# Altium PCB PAY-IF_R100.PcbDoc (part 2 of 5)
Units mm, origin at the board's own origin, x right, y up, seen from the top; angles counter-clockwise.
Board outline 93 x 90 mm, 6 copper layers (Top Layer, L2_GND, L3_PWR, L4_SIG, L5_GND, Bottom Layer), stack 1.598 mm thick; 271 components, 237 nets, 1362 pads, 661 vias.
Unrouted connection lines stored in the file: 5.
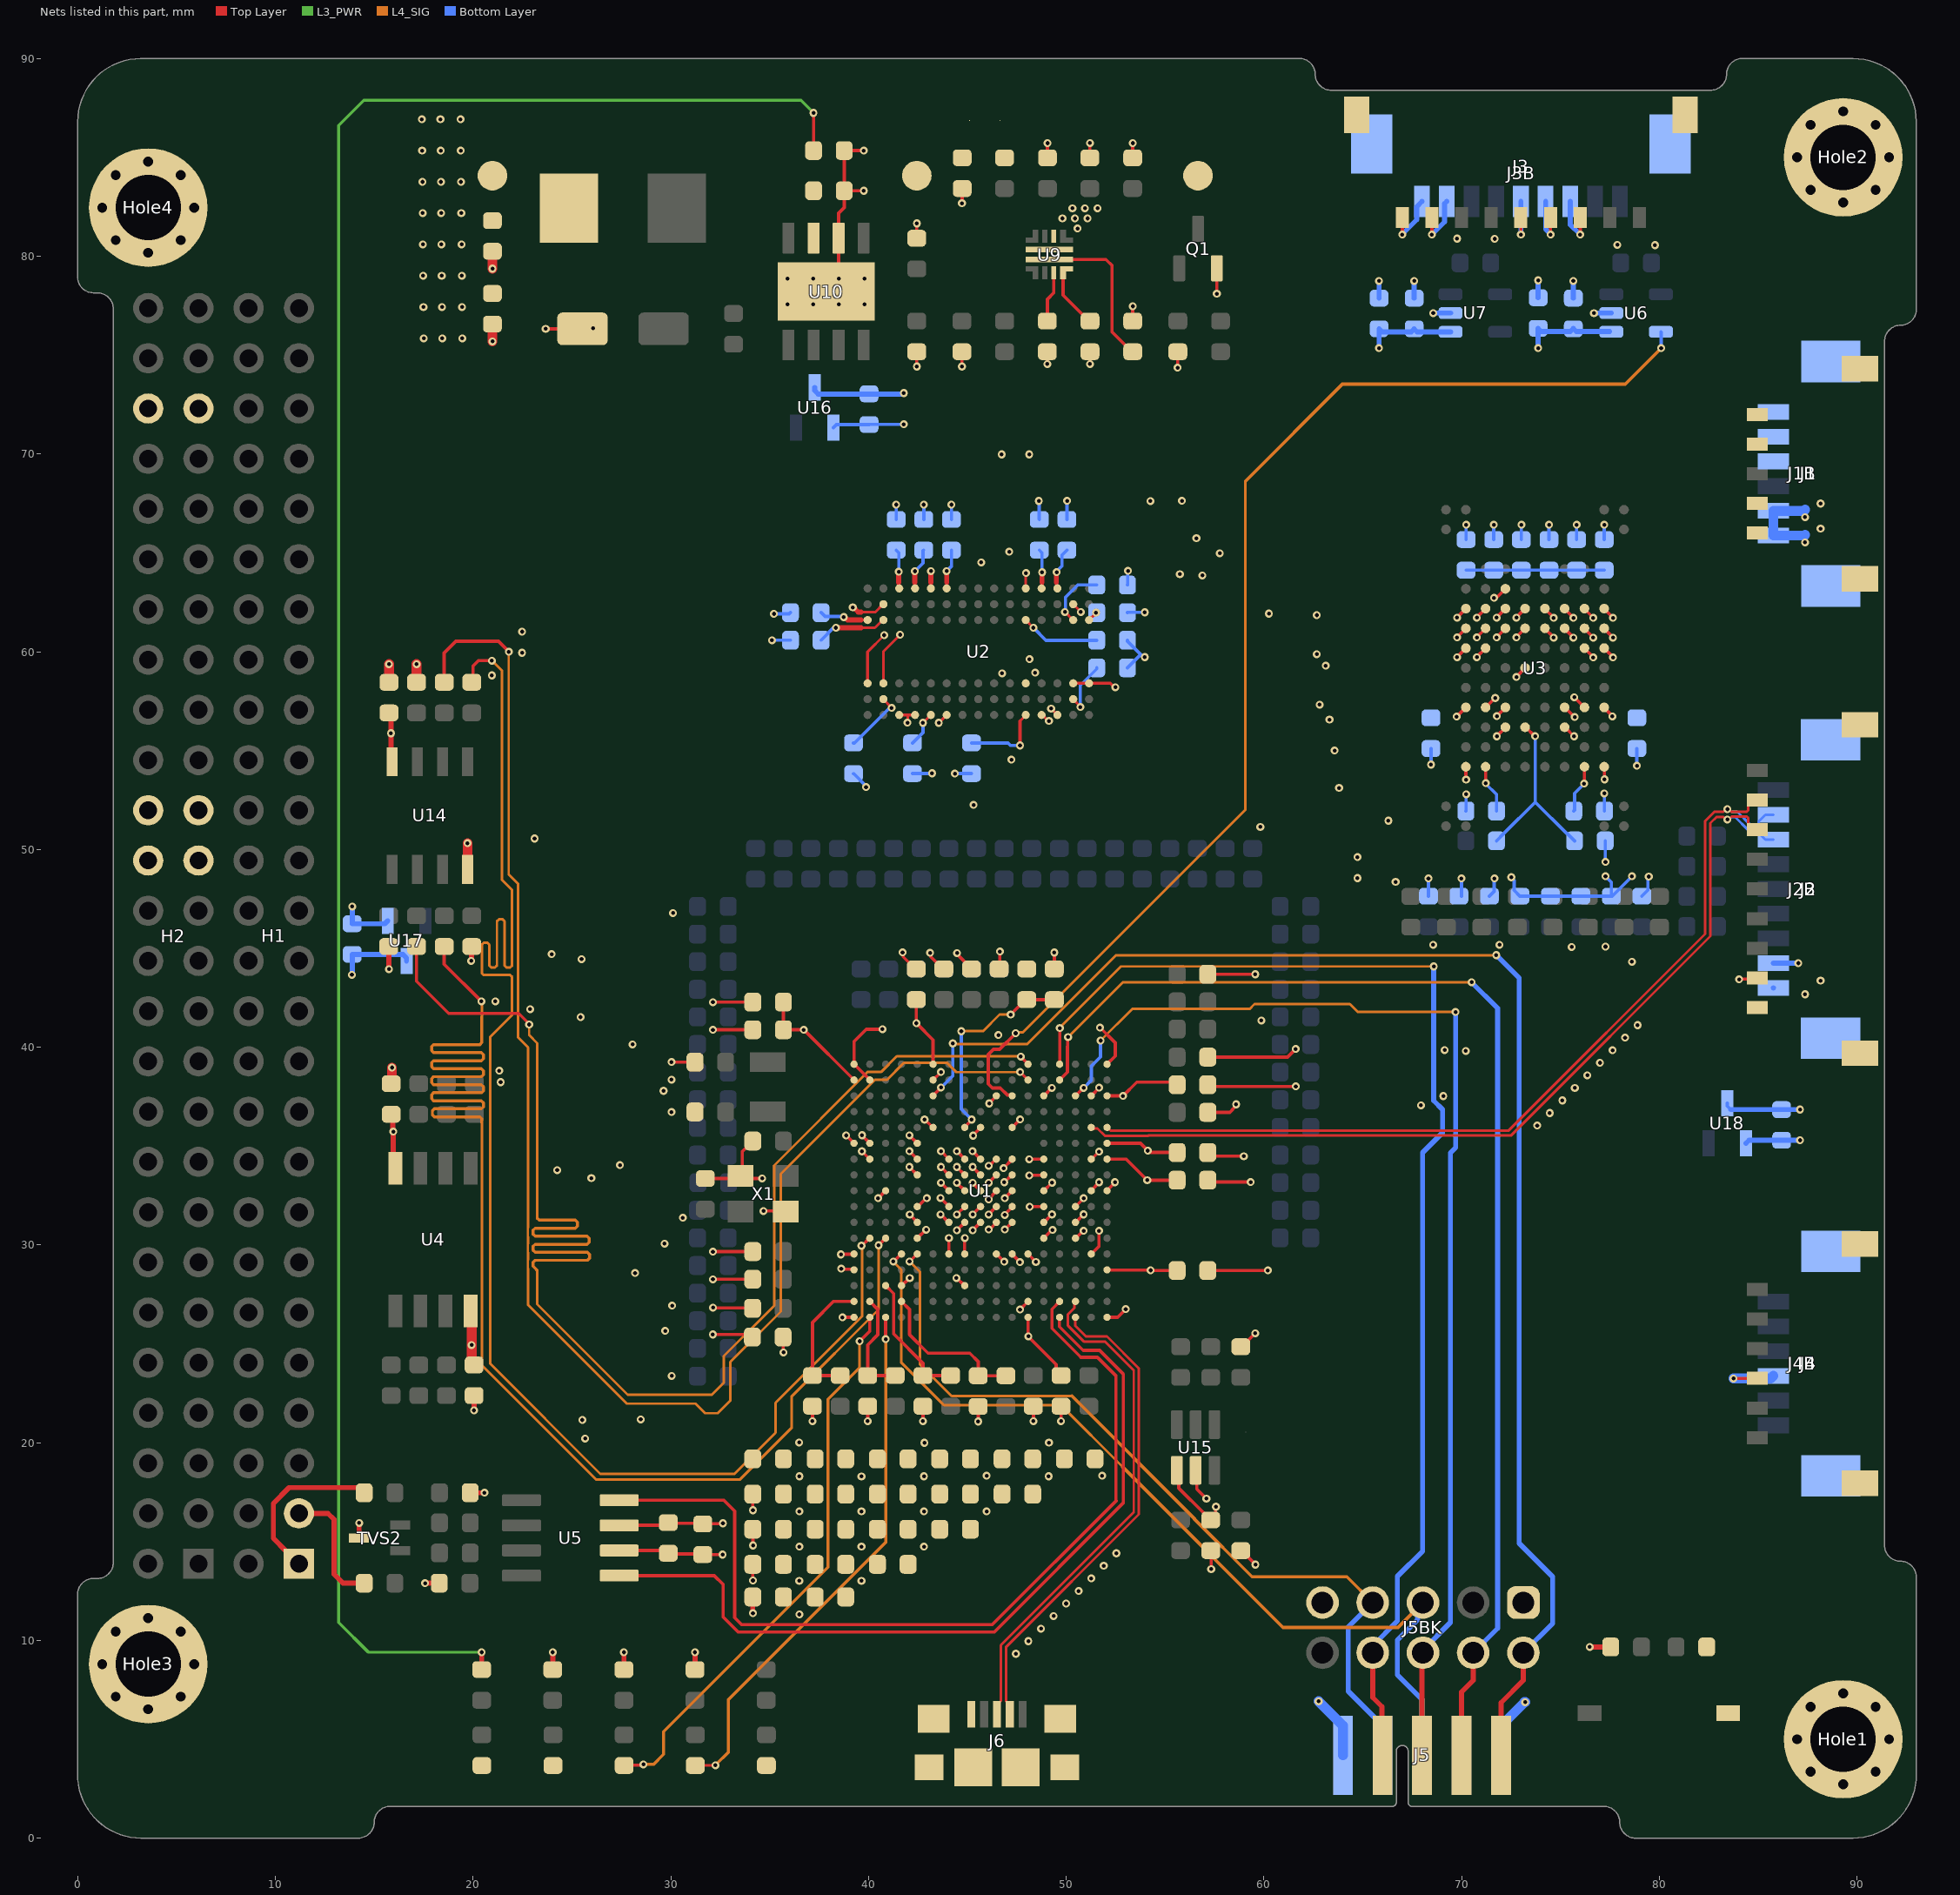
[diagram p6: the nets of this part, all layers, seen from the top]

## Part data
BT1: library part BT2, "Switch button 2 pin"
C1 C2 C3 C4 C5 C6 C7 C8 C9 C10 C11 C12 C13 C14 C15 C16 C17 C18 C19 C20 C21 C22 C23 C24 C25 C26 C27 C28 C29 C30 C31 C32 C33 C34 C35 C36 C37 C38 C39 C40 C41 C44 C45 C46 C47 C48 C49 C50 C58 C59 C60 C61 C62 C63 C64 C65 C66 C67 C68 C69 C70 C71 C72 C73 C74 C75 C76 C77 C78 C79 C80 C86 C87 C88 C89 C90 C91 C92 C93 C94 C95 C96 C97 C98 C99 C100 C101 C103: library part CAP_SMD, "CAP_Chip"
C42 C43: library part _CAP_C_2, "CAP CHIP"
D1: "DIODE SCHOTTKY 40V 5A SMA", MPN=SS34, Solder=SMT
FB2: library part FB, "FERRITE BEAD"
H1 H2: Package=None, Availability=Unavailable, MF=Samtec, MP=ESQ-126-14-G-D, Price=None
J1: "1.50mm Pitch, Pico-Lock PCB Header, Single Row, Right-Angle, Surface Mount, Gold (Au) Plating, Positive Lock, 5 Circuits, Tape and Reel", Manufacturer_Name="Molex Connector Corporation", Copyright="Copyright (C) 2025 Ultra Librarian. All rights reserved.", Manufacturer_Part_Number=5040500591, RefDes=RefDes, Type=Type
J1B J4B: library part CONN_SMD_06, Package=None, Availability=Unavailable, MP=532610671, Price=None
J2 J3: "Connector Header Surface Mount, Right Angle 9 position 0.059\" (1.50mm)"
J2B J3B: library part CONN_SMD_09, "CONN HEADER SMD R/A 9POS 1.25MM"
J4: "1.50mm Pitch, Pico-Lock PCB Header, Single Row, Right-Angle, Surface Mount, Gold (Au) Plating, Positive Lock, 6 Circuits, Tape and Reel", Manufacturer_Name="Molex Connector Corporation", Copyright="Copyright (C) 2025 Ultra Librarian. All rights reserved.", Datasheet=https://www.molex.com/en-us/products/part-detail-pdf/5040500691?display=pdf, Manufacturer_Part_Number=5040500691, RefDes=RefDes, Type=Type
J5: "pads for STLink V3 minie"
J5BK: "WR-PHD Pin Header, THT, Vertical, pitch 2.54mm, 2 Row, 10P", Contact Resistance=20mOhm, Manufacturer="Wurth Elektronik", Operating Temperature Max=105°C, Operating Temperature Min=-40°C, Rated Current=3A, Withstanding Voltage=500V, Working Voltage=250V, Category="Board-to-Board Connectors", ComponentLink1Description="Website Link", ComponentLink1URL=https://www.we-online.com/redexpert/article/61301021121?ad, ComponentLink2Description="Datasheet Link", ComponentLink2URL=https://www.we-online.com/redexpert/spec/61301021121?ad, Gender="Pin Header", Manufacturer Part Number=61301021121, Match Code=WR-PHD, Mount="Through Hole", Number of Pins=10, Number Of Rows=2, Orientation=Vertical, Packaging=Bag, Pitch=2.54mm
J6: "Micro USB 2.0 Type B Receptacle Right Angle SMT, Tape and Reel Packaging", Package=None, Check_prices=https://www.snapeda.com/parts/GMCB05321121BEU/Amphenol/view-part/?ref=eda, MF="Amphenol Commercial Products", MP=GMCB05321121BEU, SnapEDA_Link=https://www.snapeda.com/parts/GMCB05321121BEU/Amphenol/view-part/?ref=snap
L1: library part _IND, "FIXED IND 22UH 2.5A 170 MOHM SMD"
LED1 LED2 LED3 LED4 LED5: library part "LED SMD"
Q1: "BJT, SOT-23, 40V, 600mA, NPN, 0.25W, 150Â°C", Package="SOT-23 Diotec", Check_prices=https://www.snapeda.com/parts/MMBT2222A/Diotec/view-part/?ref=eda, MF="Diotec Semiconductor", MP=MMBT2222A, SnapEDA_Link=https://www.snapeda.com/parts/MMBT2222A/Diotec/view-part/?ref=snap
R1 R2 R3 R4 R5 R6 R7 R8 R9 R10 R11 R12 R13 R14 R15 R16 R17 R18 R19 R20 R21 R22 R23 R24 R25 R26 R27 R28 R29 R30 R31 R32 R33 R34 R35 R36 R37 R38 R39 R40 R41 R42 R43 R44 R45 R46 R47 R48 R49 R50 R51 R52 R53 R54 R55 R56 R57 R58 R59 R60 R61 R62 R63 R64 R65 R66 R67 R68 R69 R70 R71 R72 R73 R74 R75 R76 R77 R78 R79 R80 R81 R82 R83 R84 R85 R86 R87 R88 R89 R90 R91 R92 R93 R94 R95 R96 R97 R98 R99 R100 R114 R115 R116 R117 R118 R119 R121 R123 R124 R125 R126 R127 R128 R142 R143 R148 R150 R151 R152 R153 R154 R155 R156 R157 R158 R159 R160 R161 R162 R163 R164 R165: library part _RES_B_2, "RES"
TP1 TP12 TP13: library part MCD-00630, "Test Point 0.3mm", Manufacturer=N/A, Manufacturer_HQ_COO=Unknown, Component_Country_Of_Origin=Unknown, ComponentLink1URL=http://tunmcdsvn.tun.st.com/Component_Documentation_Library/Trunk, ECCN_EU=n/a, ECCN_US=n/a, ID=3115, Initial_Board_Reference=MB1264, Internal_Part_Number=MCD-00630, Manufacturer_Part_Number=N/A, Order_Code_Digikey=N/A, Order_Code_Farnell=N/A, Order_Code_RS=N/A, Part_Preference=Recommended, Part_Type=Misc, Provided_By=n/a, ShowFields=YES, Status=Released
TVS2: "Automotive dual-line TVS in SOT323-3L for CAN bus (12 V system)", Manufacturer_Name=STMicroelectronics, Copyright="Copyright (C) 2025 Ultra Librarian. All rights reserved.", Manufacturer_Part_Number=ESDCAN02-2BWY, RefDes=RefDes, Type=Type
U1: "High-performance and DSP with DP-FPU, Arm Cortex-M7 + Cortex-M4 MCU with 2MBytes of Flash memory, 1MB RAM, 480 MHz CPU, Art Accelerator, L1 cache, external memory interface, large set of peripherals, SMPS", Manufacturer_Name=STMicroelectronics, Copyright="Copyright (C) 2025 Ultra Librarian. All rights reserved.", Datasheet=https://www.st.com/resource/en/datasheet/stm32h745zg.pdf, Manufacturer_Part_Number=STM32H745XIH6, RefDes=RefDes, Type=Type
U2: "DRAM 128M, 3.3V, SDRAM, 4Mx32, 166Mhz, 90 ball BGA (8mmx13mm) RoHS", Manufacturer_Name="Integrated Silicon Solution Inc.", Arrow Part Number=IS42S32400J-6BL, Arrow Price/Stock=https://www.arrow.com/en/products/is42s32400j-6bl/integrated-silicon-solution-inc?utm_currency=USD&region=nac, Datasheet Link=https://www.issi.com/WW/pdf/42-45S32400J.pdf, Geometry.Height=1.2mm, Manufacturer_Part_Number=IS42S32400J-6BL
U4: "MRAM Avalanche High Performance Serial P-SRAM 4Mb in SOIC8 package with QSPI - 108MHz interface, 3V, -40 C to 105 C", Manufacturer_Name="Avalanche Technology", Mouser Part Number=793-30042040108X0PSY, Datasheet Link=https://www.mouser.ph/ProductDetail/Avalanche-Technology/AS3004204-0108X0PSAY?qs=eP2BKZSCXI7G0ggegRejGg%3D%3D, Geometry.Height=2.16mm, Manufacturer_Part_Number=AS3004204-0108X0PSAY, Mouser Price/Stock=https://www.mouser.co.uk/ProductDetail/Avalanche-Technology/AS3004204-0108X0PSAY/?qs=eP2BKZSCXI7G0ggegRejGg%3D%3D
U5: "3.3 V CAN Transceiver with Standby Mode", Package="SOIC-8 Texas Instruments", Check_prices=https://www.snapeda.com/parts/SN65HVD230DR/Texas+Instruments/view-part/?ref=eda, MF="Texas Instruments", MP=SN65HVD230DR, SnapEDA_Link=https://www.snapeda.com/parts/SN65HVD230DR/Texas+Instruments/view-part/?ref=snap
U6 U7: "Automotive LVDS Differential Driver"
U10: "5.5V to 36V Input, 3A, 500kHz Step-Down Converter", Package="HSOIC-8 Texas Instruments", Availability="In Stock", Check_prices=https://www.snapeda.com/parts/TPS5430DDAR/Texas+Instruments/view-part/?ref=eda, MF="Texas Instruments", MP=TPS5430DDAR, Price=None, Purchase-URL=https://pricing.snapeda.com/search/part/TPS5430DDAR/?ref=eda, SnapEDA_Link=https://www.snapeda.com/parts/TPS5430DDAR/Texas+Instruments/view-part/?ref=snap
U14: "No Description Available", Manufacturer_Name=ISSI, Copyright="Copyright (C) 2025 Ultra Librarian. All rights reserved.", Manufacturer_Part_Number=IS66WVS4M8BLL-104NLI, RefDes=RefDes, Type=Memory
U15: "OSC PROG TIMER TSOT23-6"
U16 U17 U18: "No Description Available", Manufacturer_Name=Microchip, Copyright="Copyright (C) 2025 Ultra Librarian. All rights reserved.", Manufacturer_Part_Number=TC1047AVNBTR, RefDes=RefDes, Type=Type
X1: library part XT4, "Crystal, 25 MHz, -30 to 85 degC, 3.2 x 2.5 x 0.9 mm SMD"
X2: "32.768 kHz +/-20ppm Crystal 12pF 70 kOhms 2-SMD, No Lead , -40C ~ 85C", Manufacturer_Name=Vishay, Mouser Part Number=70-XT1312HHRXX32K76E, Datasheet Link=https://www.vishay.com/docs/35071/xt13.pdf, Geometry.Height=0.8mm, Manufacturer_Part_Number=XT1312HHRXX32K76E, Mouser Price/Stock=https://www.mouser.co.uk/ProductDetail/Vishay-Dale/XT1312HHRXX32K76E?qs=jcD%2FCkGBYeMqyUz9UpSqCw%3D%3D

## Via types
v1: diameter 0.4, hole 0.2, Top Layer to Bottom Layer, tented both sides, 661 vias

## Nets (pads, with @x,y where several pads share a name; then routed paths per layer and width w, separated by ;. In a path a pad name is that pad's centre, name@x,y a point inside that pad or via, vN(x,y) a via of type N, cw(c..) or ccw(c..) an arc to the next point about the centre after c; other vN are vias at no path point)
3V3: C1.2 C2.2 C3.2 C4.2 C5.2 C6.2 C7.2 C8.2 C9.2 C10.2 C11.2 C12.2 C13.2 C14.2 C15.2 C16.2 C17.2 C18.2 C19.2 C20.2 C27.2 C28.2 C29.2 C30.2 C31.2 C32.2 C33.1 C34.1 C36.2 C37.2 C38.2 C39.2 C47.1 C49.2 C50.2 C58.2 C59.2 C60.2 C61.2 C62.2 C63.2 C64.2 C65.2 C66.2 C67.2 C68.2 C69.2 C70.1 C71.2 C72.2 C73.2 C74.2 C75.2 C76.2 C77.2 C78.2 C79.2 C80.2 C88.1 C89.1 C90.2 C91.2 C92.1 C95.2 C96.2 C97.2 C99.2 C101.2 FB2.1 J5.10 J5BK.1 L1.2 R1.2 R2.2 R3.2 R4.2 R5.2 R6.2 R7.2 R8.2 R17.2 R18.2 R22.2 R79.1 R80.1 R82.1 R84.1 R87.1 R117.2 R118.2 R121.2 R127.1 R151.2 R152.2 R153.2 TP13.1 U1.A6 U1.B1 U1.C17 U1.E6 U1.E9 U1.E11 U1.F5 U1.F17 U1.G5 U1.G13 U1.G17 U1.H5 U1.H13 U1.J13 U1.K5 U1.K13 U1.L5 U1.L13 U1.M5 U1.M13 U1.N7 U1.N8 U1.N10 U1.N11 U1.N12 U1.P17 U1.U12 U2.A7 U2.B2 U2.B7 U2.C9 U2.D9 U2.E1 U2.F9 U2.L1 U2.L7 U2.M9 U2.N9 U2.P2 U2.P7 U2.R7 U3.E4@72.215,63.181 U3.F2@70.215,62.181 U3.F3@71.215,62.181 U3.F4@72.215,62.181 U3.F5@73.215,62.181 U3.F6@74.215,62.181 U3.F7@75.215,62.181 U3.F8@76.215,62.181 U3.F9@77.215,62.181 U3.H3@71.215,60.181 U3.H8@76.215,60.181 U3.L2@70.215,57.181 U3.L4@72.215,57.181 U3.L7@75.215,57.181 U3.L9@77.215,57.181 U3.P3@71.215,54.181 U3.P8@76.215,54.181 U4.8 U5.3 U6.1 U7.1 U14.8 U15.1 U16.1 U17.1 U18.1 | length 172
  Top Layer w0.14: 39.624,61.211 40.324,61.211 40.714,61.601 U2.B7@40.757,61.601 ; 39.624,61.601 U2.A7@39.957,61.601 ; U2.B2@40.757,57.601 40.757,57.586 41.167,57.176 v1(41.167,57.161) ; 41.528,63.5 41.528,63.23 U2.C9@41.557,63.201 ; 42.343,63.5 42.343,63.215 U2.D9@42.357,63.201 ; v1@42.855,56.501 U2.E1@43.157,56.801 ; U2.F9@43.957,63.201 43.957,63.5 ; 47.674,56.501 47.957,56.784 U2.L1@47.957,56.801 ; U2.L7@47.957,61.601 47.957,61.599 48.343,61.213 v1(48.343,61.21) ; U2.M9@48.757,63.201 48.778,63.223 48.778,63.5 ; 49.505,63.5 49.505,63.444 49.527,63.422 49.527,63.231 U2.N9@49.557,63.201 ; v1(49.935,62.011) 49.941,62.011 50.351,61.601 U2.P7@50.357,61.601 ; U2.P2@50.357,57.601 50.357,57.583 50.723,57.217 v1(50.723,57.199) ; U2.R7@51.157,61.601 51.157,61.612 v1@51.457,61.912
  Top Layer w0.165: U5.3@27.392,15.814 27.401,15.823 29.875,15.823 29.973,15.921 31.59,15.921 C34.1@31.623,15.888 31.639,15.904 32.623,15.904 v1(32.639,15.921) ; v1(32.126,25.469) 33.999,25.469 C92.1@34.131,25.338 ; v1(32.138,26.831) 32.153,26.816 34.192,26.816 FB2.1@34.207,26.802 ; C95.2@35.7,42.276 C96.2@35.7,40.879 v1(36.729,40.879) U1.B1@39.269,38.339 ; v1(42.069,33.939) U1.H5@42.469,33.539 ; v1(42.069,34.739) U1.G5@42.469,34.339 ; v1(42.069,35.539) U1.F5@42.469,35.139 ; v1(42.089,31.533) 42.089,31.526 42.469,31.146 U1.L5@42.469,31.139 ; C88.1@42.418,42.405 42.419,42.404 42.419,41.213 v1(42.421,41.212) ; v1@42.424,41.215 42.424,41.208 43.269,40.363 U1.A6@43.269,39.139 ; R127.1@42.444,80.912 v1(42.444,81.661) ; U1.M5@42.469,30.339 42.477,30.339 42.907,30.769 v1(42.916,30.769) ; U1.K5@42.469,31.939 42.498,31.939 42.92,32.361 v1(42.95,32.361) ; v1(42.756,56.402) v1@42.855,56.501 ; v1(42.838,36.339) 42.853,36.339 43.253,35.939 U1.E6@43.269,35.939 ; U1.N7@44.069,29.539 v1(44.069,30.345) ; U1.N8@44.869,29.539 44.862,29.546 44.862,30.337 v1@44.869,30.345 ; v1(45.294,35.525) 45.294,35.544 45.669,35.92 U1.E9@45.669,35.939 ; U1.N10@46.469,29.539 46.474,29.539 46.861,29.152 v1(46.865,29.152) ; R84.1@46.609,43.955 46.645,43.991 v1(46.645,44.837) ; U1.N11@47.269,29.539 47.269,29.528 47.663,29.135 v1(47.663,29.124) ; U1.E11@47.269,35.939 v1(47.674,36.343) ; v1(47.665,55.258) 47.665,56.492 47.674,56.501 ; U1.U12@48.069,26.339 48.072,26.336 48.072,25.388 v1(48.086,25.374) ; U1.N12@48.069,29.539 v1(48.469,29.139) ; v1@48.075,25.367 49.491,23.951 49.491,23.643 C89.1@49.74,23.393 ; v1(48.131,33.511) 48.145,33.525 48.855,33.525 U1.H13@48.869,33.539 ; v1(48.131,34.331) 48.135,34.335 48.85,34.335 U1.G13@48.859,34.326 ; v1(48.158,31.928) 48.164,31.933 48.863,31.933 U1.K13@48.869,31.939 ; U1.M13@48.869,30.339 49.286,30.756 v1(49.308,30.756) ; U1.L13@48.869,31.139 48.876,31.139 49.278,31.541 v1(49.285,31.541) ; U1.J13@48.869,32.739 48.873,32.739 49.283,33.149 v1(49.287,33.149) ; v1(49.048,74.549) R117.2@49.048,75.171 ; R82.1@49.403,43.955 v1(49.403,44.788) ; v1(51.207,74.549) R118.2@51.207,75.171 ; U1.P17@52.069,28.739 52.081,28.727 54.263,28.727 v1(54.275,28.715) 54.281,28.709 55.606,28.709 C80.2@55.61,28.705 ; U1.G17@52.069,34.339 53.037,34.339 v1(54.102,33.274) C91.2@55.613,33.274 ; U1.F17@52.069,35.139 53.756,35.139 v1(54.13,34.765) 54.194,34.765 54.284,34.675 55.609,34.675 C90.2@55.613,34.671 ; U1.C17@52.069,37.539 v1@52.871,37.539 ; v1(52.876,37.533) 53.577,38.233 55.48,38.233 C47.1@55.613,38.1 ; U15.1@55.599,18.604 55.701,18.502 55.701,17.699 56.963,16.437 56.963,16.433 57.307,16.089 C59.2@57.311,16.089 57.56,16.338 57.56,16.738 v1(57.578,16.756) ; R18.2@57.163,39.497 61.197,39.497 v1(61.61,39.91) ; R22.2@57.163,43.688 v1(59.563,43.688) ; v1(69.754,56.721) U3.L2@70.215,57.181 ; v1(69.773,61.722) 69.773,61.739 U3.F2@70.215,62.181 U3.F2@70.215,62.198 ; v1(70.773,59.722) 70.773,59.739 U3.H3@71.215,60.181 U3.H3@71.215,60.198 ; v1(70.773,61.722) 70.773,61.739 U3.F3@71.215,62.181 U3.F3@71.215,62.198 ; U3.P3@71.215,54.181 71.218,54.178 71.218,53.356 v1(71.222,53.353) ; v1(71.646,62.722) 71.665,62.741 71.775,62.741 U3.E4@72.215,63.181 ; v1(71.773,61.722) 71.773,61.739 U3.F4@72.215,62.181 U3.F4@72.215,62.198 ; v1(71.786,56.737) 71.786,56.744 72.215,57.173 U3.L4@72.215,57.181 ; v1(72.773,61.722) 72.773,61.739 U3.F5@73.215,62.181 U3.F5@73.215,62.198 ; U3.F6@74.215,62.19 U3.F6@74.215,62.181 74.215,62.172 74.657,61.731 v1(74.657,61.714) ; U3.L7@75.215,57.181 75.223,57.181 75.711,56.692 v1(75.719,56.692) ; U3.F7@75.215,62.19 U3.F7@75.215,62.181 75.215,62.172 75.657,61.731 v1(75.657,61.714) ; v1(76.2,53.327) 76.208,53.335 76.208,54.174 U3.P8@76.215,54.181 ; U3.H8@76.215,60.19 76.215,60.172 76.657,59.731 v1(76.657,59.714) ; U3.F8@76.215,62.19 76.215,62.172 76.657,61.731 v1(76.657,61.714) ; U3.L9@77.215,57.181 77.215,57.16 77.628,56.747 v1(77.628,56.726) ; U3.F9@77.215,62.19 U3.F9@77.215,62.181 77.215,62.172 77.657,61.731 v1(77.657,61.714)
  Top Layer w0.254: R151.2@15.736,45.093 15.742,45.087 15.742,43.948 v1(15.748,43.942) ; C58.2@15.748,56.904 15.847,56.805 v1(15.847,55.876) 15.847,54.5 U14.8@15.913,54.434 ; C32.2@15.86,36.603 15.945,36.518 15.945,35.745 v1(15.963,35.727) 15.963,33.969 U4.8@16.067,33.866 ; R152.2@17.145,58.454 v1@17.145,59.203 ; v1(19.906,44.367) 19.923,44.384 19.923,45.077 R153.2@19.939,45.093 ; v1(20.051,21.63) C31.2@20.051,22.379 ; R121.2@24.032,8.521 v1(24.032,9.398) ; R79.1@27.63,8.521 v1(27.63,9.398) ; R80.1@31.228,8.521 v1(31.228,9.398) ; v1(38.354,61.211) 39.624,61.211 ; v1(38.751,61.75) 38.791,61.75 38.939,61.601 39.624,61.601 ; 41.528,63.5 41.528,64.037 v1(41.534,64.043) ; 42.343,63.5 42.343,64.066 v1(42.349,64.072) ; 43.957,63.5 v1(43.957,64.073) ; 48.778,63.5 48.778,64.015 v1(48.78,64.017) ; 49.505,63.5 49.505,64.008 v1(49.518,64.02) ; v1@51.457,61.912 51.511,61.966 v1(51.511,61.977) ; v1(76.482,9.667) R87.1@77.545,9.667
  Top Layer w0.5: R152.2@17.145,58.454 v1(17.145,59.367)
  Bottom Layer w0.165: C8.2@37.605,60.579 37.605,60.583 38.206,61.183 38.326,61.183 v1(38.354,61.211) ; C12.2@37.605,61.976 37.803,61.778 38.723,61.778 v1(38.751,61.75) ; U16.1@38.232,71.337 38.384,71.488 C99.2@40.031,71.488 40.038,71.495 41.777,71.495 v1(41.783,71.501) ; C19.2@39.243,55.385 39.293,55.385 41.041,57.133 41.139,57.133 v1(41.167,57.161) ; C7.2@41.402,65.138 41.534,65.006 v1(41.534,64.043) ; C16.2@42.227,55.385 42.231,55.385 42.757,55.911 v1@42.757,56.345 ; v1(42.349,64.072) 42.356,64.072 42.764,64.481 42.764,65.107 C14.2@42.795,65.138 ; v1(43.957,64.073) 44.196,64.312 C20.2@44.196,65.138 ; C15.2@45.212,55.385 47.06,55.385 47.187,55.258 v1(47.665,55.258) ; v1(48.343,61.21) 48.979,60.574 C11.2@51.544,60.574 ; C18.2@48.641,65.138 48.78,64.999 v1(48.78,64.017) ; v1(49.518,64.02) 49.518,64.06 49.79,64.332 49.79,64.89 C17.2@50.038,65.138 ; v1(49.935,62.011) 49.968,62.044 49.968,62.756 50.586,63.373 C13.2@51.549,63.373 ; v1(50.723,57.199) 50.723,57.262 50.718,57.267 50.718,57.899 50.709,57.907 50.709,58.292 51.549,59.132 C10.2@51.549,59.182 ; v1(51.511,61.977) C9.2@51.518,61.977 ; C9.2@51.519,61.976 C9.2@51.549,61.976 ; R1.2@68.326,47.638 v1(68.326,48.53) ; R2.2@69.995,47.638 v1(69.995,48.53) ; C6.2@70.231,64.122 C5.2@71.628,64.122 C29.2@73.025,64.122 C30.2@74.422,64.122 C28.2@75.819,64.122 C1.2@77.216,64.122 ; v1(71.222,53.353) 71.222,53.327 71.768,52.781 C3.2@71.768,51.943 ; R3.2@71.41,47.638 71.645,47.873 71.645,48.511 v1(71.664,48.53) ; v1(72.518,48.593) 72.518,48.567 72.657,48.427 72.657,47.929 72.949,47.638 R4.2@72.952,47.638 R5.2@74.495,47.638 R6.2@76.037,47.638 R7.2@77.579,47.638 ; C27.2@75.679,51.943 75.715,51.979 75.715,52.842 v1(76.2,53.327) ; R17.2@77.265,50.433 77.272,50.426 77.272,49.374 v1(77.279,49.367) ; v1(77.279,48.641) 77.579,48.342 R7.2@77.579,47.638 ; v1(78.613,48.641) 78.613,48.632 77.619,47.638 R7.2@77.579,47.638 ; R8.2@79.121,47.638 79.425,47.942 79.425,48.582 v1(79.47,48.627)
  Bottom Layer w0.254: v1(13.888,47.117) C101.2@13.888,46.241 15.536,46.241 U17.1@15.687,46.392 ; v1(65.826,75.349) C36.2@65.826,76.329 65.978,76.177 67.452,76.177 C37.2@67.604,76.329 67.756,76.177 U7.1@69.444,76.177 ; v1(73.874,75.349) C38.2@73.874,76.352 74.026,76.2 75.5,76.2 75.652,76.352 75.804,76.2 U6.1@77.492,76.2 ; U18.1@84.389,35.142 84.54,35.293 C97.2@86.188,35.293 v1(87.122,35.293)
  Bottom Layer w0.5: J5.10@72,4.186 72,5.686 73.184,6.871 v1(73.214,6.871)
  other v1: 36.506,11.311 36.501,13.008 36.506,14.74 42.81,14.74 36.506,16.518 42.81,16.518 36.506,18.296 42.81,18.296 49.115,18.296 42.828,19.992 49.131,20.001 36.497,20.011 44.874,30.345 17.505,75.851 18.441,75.851 19.457,75.851 17.492,77.433 18.428,77.433 19.444,77.433 17.478,79.015 18.415,79.015 19.431,79.015 17.465,80.597 18.401,80.597 19.417,80.597 17.452,82.18 18.388,82.18 19.404,82.18 17.438,83.762 18.375,83.762 19.391,83.762 17.425,85.344 18.361,85.344 19.377,85.344 17.412,86.926 18.348,86.926 19.364,86.926
12V: C40.2 C45.2 C48.2 R119.2 SB1.2 TP1.1 U9.6 U10.7 | length 111.2
  Top Layer w0.165: C45.2@37.224,85.344 v1(37.224,87.249)
  Top Layer w0.254: R119.2@20.435,8.521 v1(20.435,9.398)
  L3_PWR w0.152: v1(20.435,9.398) 14.708,9.398 13.208,10.898 13.208,86.614 14.478,87.884 36.589,87.884 v1(37.224,87.249)
12V_CONN: C41.2 J1.1 J1.2 J1B.5 J1B.6 J2.1 J2B.9 R123.1 SB1.1 TP12.1 U9.5 | length 12.6
  Top Layer w0.165: U9.5@49.147,79.839 52.015,79.839 52.324,79.529 52.324,76.163 53.316,75.171 C41.2@53.366,75.171
  Bottom Layer w0.254: J2B.9@85.77,43 J2B.9@85.773,42.997
  Bottom Layer w0.5: 87.376,65.913 87.338,65.875 J1B.6@85.773,65.875 J1B.5@85.773,67.125 87.318,67.125 87.376,67.183
  other v1: 87.376,42.674 88.158,43.364 87.376,65.532 88.158,66.222 87.376,66.802 88.158,67.492
ADC_ILM: C21.2 R85.2 U1.T4 | length 8
  Top Layer w0.165: U1.T4@41.669,27.139 42.073,26.735 42.073,25.465 43.012,24.526 45.121,24.526 45.551,24.096 45.551,23.393 45.564,23.381 R85.2@46.948,23.381
ADC_TEMP_1: C98.2 R163.2 U1.T1 | length 6.6
  Top Layer w0.165: R163.2@38.566,23.393 C98.2@37.169,23.393 37.169,26.081 38.227,27.139 U1.T1@39.269,27.139
ADC_TEMP_2: C100.2 R164.2 U1.T2 | length 5.5
  Top Layer w0.165: U1.T2@40.069,27.139 40.473,26.735 40.473,25.453 39.963,24.944 C100.2@39.963,23.393 R164.2@41.354,23.393
ADC_TEMP_3: C103.2 R165.2 U1.R3 | length 6.7
  Top Layer w0.165: U1.R3@40.869,27.939 41.271,27.537 41.271,25.497 42.757,24.01 C103.2@42.757,23.393 R165.2@44.154,23.393
AUXOFF: R117.1 U9.3 | length 2.6
  Top Layer w0.165: R117.1@49.048,76.721 49.048,77.828 49.372,78.152 U9.3@49.372,79.163
BOOT0: R82.2 R83.1 U1.E8 | length 10.7
  Top Layer w0.165: U1.E8@44.869,35.939 44.869,35.962 45.222,36.316 v1(45.222,36.339) ; v1(47.192,41.65) 47.196,41.65 47.951,42.405 R83.1@48.006,42.405 ; R83.1@47.956,42.405 R82.2@49.403,42.405
  L4_SIG w0.13: v1(44.695,40.805) 44.711,40.821 45.807,40.821 46.635,41.65 v1(47.192,41.65)
  Bottom Layer w0.165: v1(44.695,40.805) 44.695,36.866 v1(45.222,36.339)
CAN0_H: H1.03 R143.2 | length 6.4
  Top Layer w0.254: H1.03@11.19,16.42 12.663,16.42 12.968,16.115 12.968,13.349 13.424,12.893 R143.2@14.497,12.893
CAN0_L: H1.01 R142.2 | length 8.6
  Top Layer w0.254: H1.01@11.18,13.88 11.18,13.89 10.552,14.518 10.542,14.518 9.896,15.164 9.896,16.925 10.693,17.722 14.24,17.722 R142.2@14.497,17.465
CAN_RX: U1.T14 U5.4 | length 45.6
  Top Layer w0.15: U1.T14@49.669,27.139 49.277,26.747 49.277,25.779 50.739,24.318
  Top Layer w0.165: U5.4@27.392,17.084 32.683,17.084 33.23,16.536 ; 50.739,24.318 51.577,24.318 52.523,23.372 52.523,17.055
  Top Layer w0.169: 33.23,16.536 33.23,11.148 33.582,10.796 46.264,10.796 52.523,17.055
CAN_TX: U1.U14 U5.1 | length 41.6
  Top Layer w0.15: U1.U14@49.656,26.326 49.656,25.873 50.867,24.662
  Top Layer w0.165: U5.1@27.392,13.274 32.202,13.274 32.649,12.826 ; U1.U14@49.656,26.326 U1.U14@49.669,26.339 ; 50.867,24.662 51.697,24.662 52.886,23.473 52.886,16.946
  Top Layer w0.169: 32.649,12.826 32.649,11.177 33.403,10.423 46.363,10.423 52.886,16.946
COMM_USB_FS_N: J6.2 U1.U15 | length 24.9
  Top Layer w0.13: J6.2@47.15,6.257 47.15,6.732 46.954,6.928 46.954,9.651 53.677,16.375 53.677,23.758 52.061,25.374 50.998,25.374 50.469,25.903 U1.U15@50.469,26.339
COMM_USB_FS_P: J6.3 U1.T15 | length 25.9
  Top Layer w0.13: J6.3@46.5,6.257 46.5,6.732 46.696,6.928 46.696,9.758 53.42,16.481 53.42,23.652 51.955,25.117 50.891,25.117 50.094,25.914 50.094,26.494 50.423,26.824 50.423,27.093 U1.T15@50.469,27.139
DEBUG_UART_RX: J5.8 J5BK.5 U1.N4 | length 47.1
  Top Layer w0.165: v1(41.257,29.157) 41.272,29.157 41.654,29.539 U1.N4@41.669,29.539
  L4_SIG w0.13: v1(41.257,29.157) 41.651,28.764 41.651,24.059 43.807,21.903 49.726,21.903 52.855,18.773 52.855,18.77
  L4_SIG w0.169: 52.855,18.77 60.968,10.657 66.791,10.657 J5BK.5@68.047,11.913
  Bottom Layer w0.254: J5.8@68,4.186 68,7.012 66.757,8.255 66.757,10.018 67.779,11.041 67.779,11.645 J5BK.5@68.047,11.913
DEBUG_UART_TX: J5.7 J5BK.7 U1.N5 | length 42.8
  Top Layer w0.165: v1(42.077,29.162) 42.085,29.162 42.462,29.539 U1.N5@42.469,29.539
  L4_SIG w0.13: v1(42.077,29.162) 42.614,28.625 42.614,23.94 44.202,22.352 50.295,22.352
  L4_SIG w0.169: 50.295,22.352 56.495,16.152 56.495,16.124 59.402,13.218 64.201,13.218 J5BK.7@65.507,11.913
  Bottom Layer w0.254: J5BK.7@65.507,11.913 64.262,10.668 64.262,7.424 66,5.686 J5.7@66,4.186
eMMC_RSTn: R17.1 R19.1 U3.M5@73.215,56.181 | length 9.6
  Top Layer w0.165: U3.M5@73.215,56.181 73.241,56.181 73.693,55.729 v1(73.719,55.729)
  Bottom Layer w0.165: R19.1@71.768,50.433 71.768,50.437 72.112,50.781 72.116,50.781 73.729,52.394 ; v1(73.719,55.729) 73.729,55.72 73.729,52.394 ; R17.1@75.715,50.433 75.715,50.437 75.371,50.781 75.342,50.781 73.729,52.394
EXP_USB_FS_N: J2.8 J2B.2 U1.E17 | length 46.4
  Top Layer w0.13: U1.E17@52.069,35.939 52.098,35.939 52.265,35.772 54.044,35.772 54.059,35.786 72.388,35.786 82.321,45.72 82.321,51.433 82.791,51.903 83.241,51.903 83.374,52.037 83.52,52.037 83.643,51.914 84.426,51.914 84.502,51.991 84.502,52.235 84.767,52.5 J2.8@84.958,52.5
  Bottom Layer w0.13: v1(83.447,52.037) 83.52,52.037 83.654,51.903 83.944,51.903 84.594,51.254 84.958,51.254 85.035,51.33 85.035,51.415 85.37,51.75 J2B.2@85.77,51.75
EXP_USB_FS_P: J2.7 J2B.3 U1.E16 | length 47.4
  Top Layer w0.13: U1.E16@51.269,35.939 51.315,35.893 51.584,35.893 51.963,35.514 54.151,35.514 54.166,35.529 72.494,35.529 82.579,45.613 82.579,51.327 82.898,51.646 83.241,51.646 83.374,51.512 83.52,51.512 83.665,51.657 84.426,51.657 84.502,51.581 84.502,51.265 84.767,51 J2.7@84.958,51
  Bottom Layer w0.13: v1(83.447,51.512) 83.52,51.512 83.654,51.646 83.838,51.646 84.487,50.996 84.958,50.996 85.035,50.92 85.035,50.835 85.37,50.5 J2B.3@85.77,50.5
FLT#: R118.1 U9.4 | length 3
  Top Layer w0.165: U9.4@49.847,79.163 49.847,78.031 51.157,76.721 R118.1@51.207,76.721
FRAM_CS: R154.1 U1.A12 | length 76.6
  Top Layer w0.152: R154.1@17.145,45.093 17.145,43.332 18.771,41.707 22.301,41.707 22.837,41.171 v1(22.837,41.147)
  Top Layer w0.165: v1(47.708,39.519) 47.708,39.51 48.069,39.149 U1.A12@48.069,39.139
  L4_SIG w0.13: v1(22.837,41.147) 22.837,40.613 23.244,40.206 23.244,32.427 ; 23.244,28.637 23.244,27.004 27.823,22.425 32.081,22.425 32.685,23.03 32.685,24.381 35.231,26.926 35.231,34.022 39.948,38.739 40.633,38.739 41.433,39.539 47.689,39.539 v1(47.708,39.519)
  L4_SIG w0.152: 23.244,28.637 23.244,28.713 23.143,28.814 23.139,28.814 23.037,28.916 23.037,29.119 23.139,29.22 25.785,29.22 25.886,29.322 25.886,29.525 25.785,29.626 23.139,29.626 23.037,29.728 23.037,29.931 23.139,30.032 25.771,30.032 25.872,30.134 25.872,30.337 25.771,30.438 23.139,30.438 23.037,30.54 23.037,30.743 23.139,30.844 25.17,30.844 25.271,30.946 25.271,31.149 25.17,31.25 23.346,31.25 23.244,31.352 23.244,32.427
FRAM_SPI2_MISO: R157.1 U1.M3 | length 77.5
  Top Layer w0.165: v1(40.514,29.979) 40.514,29.982 U1.M3@40.869,30.339 U1.M3@40.869,30.339
  Top Layer w0.169: R157.1@18.577,45.058 R157.1@18.542,45.093 18.542,44.196 v1(20.422,42.316)
  L4_SIG w0.13: v1(20.422,42.316) 20.444,42.294 20.444,41.525 ; 20.444,36.173 20.444,23.918 26.237,18.125 33.487,18.125 36.124,20.762 36.124,22.347 40.514,26.737 v1(40.514,29.979)
  L4_SIG w0.152: 20.444,36.173 20.444,36.374 20.342,36.475 18.043,36.475 17.942,36.577 17.942,36.78 18.043,36.881 20.425,36.881 20.526,36.983 20.526,37.186 20.425,37.287 18.005,37.287 17.904,37.389 17.904,37.592 18.005,37.693 20.425,37.693 20.526,37.795 20.526,37.998 20.425,38.099 18.005,38.099 17.904,38.201 17.904,38.404 18.005,38.505 20.425,38.505 20.526,38.607 20.526,38.81 20.425,38.911 18.005,38.911 17.904,39.013 17.904,39.216 18.005,39.317 20.425,39.317 20.526,39.419 20.526,39.622 20.425,39.723 18.005,39.723 17.904,39.825 17.904,40.028 18.005,40.129 20.342,40.129 20.444,40.231 20.444,41.525
FRAM_SPI2_MOSI: R156.1 U1.M2 | length 77.7
  Top Layer w0.165: v1(39.646,29.959) 39.667,29.959 40.047,30.339 U1.M2@40.069,30.339
  Top Layer w0.169: R156.1@19.939,58.454 20,58.454 20,59.268 20.279,59.547 v1(20.955,59.547)
  L4_SIG w0.13: v1(20.955,59.547) 21.459,59.043 21.459,48.458 21.978,47.939 21.978,47.371 21.978,44.126 21.882,44.03 21.69,44.03 21.594,44.126 21.594,46.367 21.498,46.463 21.306,46.463 21.21,46.367 21.21,44.126 21.114,44.03 20.922,44.03 20.826,44.126 20.826,45.182 20.73,45.278 20.538,45.278 20.442,45.182 20.442,43.742 20.538,43.646 21.882,43.646 21.978,43.55 21.978,43.485 21.978,41.632 20.875,40.529 20.875,23.984 26.438,18.421 33.226,18.421 35.306,20.502 35.306,22.014 39.673,26.38 39.673,29.932 v1(39.646,29.959)
FRAM_SPI2_SCK: R155.1 U1.B12 | length 79.2
  Top Layer w0.165: v1(47.674,38.741) 47.674,38.737 48.069,38.343 U1.B12@48.069,38.339
  Top Layer w0.169: R155.1@18.542,58.454 18.542,59.933 19.137,60.528 21.28,60.528 v1(21.808,60)
  L4_SIG w0.13: v1(21.808,60) 21.803,59.995 21.803,48.742 22.267,48.278 22.267,40.506 22.784,39.989 22.784,30.866 22.771,30.853 22.771,30.43 22.784,30.417 22.784,30.054 22.771,30.041 22.771,29.618 22.784,29.605 22.784,29.242 22.771,29.229 22.771,28.806 22.784,28.793 22.784,26.963 27.776,21.971 31.258,21.971 31.741,21.488 32.372,21.488 33.01,22.126 33.01,24.081 35.56,26.631 35.56,33.588 40.326,38.354 40.94,38.354 41.786,39.2 43.985,39.2 44.448,38.738 47.671,38.738 v1(47.674,38.741)
GND: BT1.1 C1.1 C2.1 C3.1 C4.1 C5.1 C6.1 C7.1 C8.1 C9.1 C10.1 C11.1 C12.1 C13.1 C14.1 C15.1 C16.1 C17.1 C18.1 C19.1 C20.1 C21.1 C22.1 C23.1 C24.1 C25.1 C26.1 C27.1 C28.1 C29.1 C30.1 C31.1 C32.1 C33.2 C34.2 C35.2 C36.1 C37.1 C38.1 C39.1 C40.1 C41.1 C42.1 C43.1 C45.1 C46.1 C47.2 C48.1 C49.1 C50.1 C58.1 C59.1 C60.1 C61.1 C62.1 C63.1 C64.1 C65.1 C66.1 C67.1 C68.1 C69.1 C70.2 C71.1 C72.1 C73.1 C74.1 C75.1 C76.1 C77.1 C78.1 C79.1 C80.1 C86.1 C87.1 C88.2 C89.2 C90.1 C91.1 C92.2 C93.1 C94.1 C95.1 C96.1 C97.1 C98.1 C99.1 C100.1 C101.1 C103.1 D1.1 H2.29 H2.30 H2.31 H2.32 H2.47 H2.48 Hole1.1 Hole2.1 Hole3.1 Hole4.1 J1.4 J1.5 J1.6 J1B.1 J1B.2 J1B.3 J1B.S1 J1B.S2 J2.2 J2.10 J2B.8 J2B.S1 J2B.S2 J3.5 J3.10 J3B.5 J3B.S1 J3B.S2 J4.3 J4.7 J4B.4 J4B.S1 J4B.S2 J5.6 J5BK.9 J6.5 J6.SH1 J6.SH2 J6.SH3 J6.SH4 J6.SH5 J6.SH6 LED3.2 LED4.2 LED5.2 Q1.2 R83.2 R86.2 R91.1 R116.1 R125.2 R126.2 R128.2 R161.1 R162.1 TVS2.3 U1.A1 U1.A17 U1.B2 U1.B6 U1.C10 U1.C13 U1.C16 U1.F1 U1.F2 U1.G2 U1.G7 U1.G8 U1.G9 U1.G10 U1.G11 U1.G16 U1.H7 U1.H8 U1.H9 U1.H10 U1.H11 U1.J3 U1.J7 U1.J8 U1.J9 U1.J10 U1.J11 U1.J16 U1.J17 U1.K7 U1.K8 U1.K9 U1.K10 U1.K11 U1.K15 U1.L7 U1.L8 U1.L9 U1.L10 U1.L11 U1.L15 U1.M15 U1.N1 U1.N16 U1.P1 U1.R4 U1.R8 U1.T12 U1.U1 U1.U17 U2.A3 U2.B3 U2.B8 U2.C1 U2.D1 U2.E9 U2.F1 U2.L3 U2.L9 U2.M1 U2.N1 U2.P3 U2.P8 U2.R3 U3.G2@70.215,61.181 U3.G3@71.215,61.181 U3.G4@72.215,61.181 U3.G5@73.215,61.181 U3.G6@74.215,61.181 U3.G7@75.215,61.181 U3.G8@76.215,61.181 U3.G9@77.215,61.181 U3.H2@70.215,60.181 U3.H9@77.215,60.181 U3.J5@73.215,59.181 U3.L3@71.215,57.181 U3.L8@76.215,57.181 U3.M4@72.215,56.181 U3.M7@75.215,56.181 U3.P2@70.215,54.181 U3.P9@77.215,54.181 U4.4 U5.2 U6.2 U7.2 U9.8 U10.6 U10.9 U14.4 U15.2 U16.3 U17.3 U18.3 X1.2 X1.4 | length 188.3
  Top Layer w0.12: 47.957,63.5 47.957,63.966 v1(47.965,63.975)
  Top Layer w0.125: U2.L9@47.957,63.201 47.957,63.5
  Top Layer w0.14: 39.624,62.001 39.791,62.001 40.122,62.001 ; U2.A3@39.957,58.401 39.957,59.993 v1(40.801,60.837) ; 40.123,62.002 40.347,62.002 40.746,62.401 U2.B8@40.757,62.401 ; U2.B3@40.757,58.401 40.757,60.019 v1(41.597,60.86) ; U2.C1@41.557,56.801 41.991,56.801 ; v1(41.976,56.408) 41.991,56.423 41.991,56.801 ; U2.D1@42.357,56.801 41.991,56.801 ; U2.E9@43.157,63.201 43.157,63.5 ; v1(43.556,56.402) U2.F1@43.956,56.801 ; U2.M1@48.757,56.801 48.792,56.801 v1@49.092,56.501 ; v1(49.24,57.123) 49.24,57.121 49.557,56.804 U2.N1@49.557,56.801 ; U2.P8@50.357,62.401 50.357,62.398 50.745,62.01 v1(50.745,62.006)
  Top Layer w0.165: v1(23.672,76.332) 23.677,76.327 D1.1@25.535,76.327 ; U5.2@27.392,14.544 29.875,14.544 30.048,14.371 31.59,14.371 C34.2@31.623,14.338 v1(32.623,14.338) ; v1(30.035,39.245) C25.1@31.225,39.245 ; C23.1@31.75,33.358 33.396,33.358 X1.4@33.521,33.483 ; v1(32.133,28.261) v1(32.133,28.261) 34.151,28.263 C94.1@34.153,28.261 ; v1(32.133,29.658) v1(32.133,29.658) 34.151,29.66 C93.1@34.153,29.658 ; v1(32.133,40.876) C96.1@34.151,40.877 ; v1(32.133,42.273) C95.1@34.151,42.274 ; C69.1@34.144,13.849 C69.1@34.15,13.843 34.15,13.034 v1(34.156,13.027) ; C66.1@34.144,17.405 C66.1@34.15,17.399 34.15,16.59 v1(34.156,16.583) ; C67.1@34.15,15.621 34.156,15.615 34.156,14.805 v1(34.163,14.799) ; C22.1@34.15,35.25 34.15,35.246 33.859,34.955 33.855,34.955 33.621,34.721 33.621,33.583 X1.4@33.521,33.483 ; v1(34.628,33.362) 33.642,33.362 X1.4@33.521,33.483 ; v1(34.689,31.715) 35.789,31.715 X1.2@35.821,31.683 ; C92.2@35.681,25.338 35.69,25.329 35.69,24.574 v1(35.699,24.565) ; v1(37.169,21.082) C98.1@37.169,21.843 ; U10.6@38.507,78.867 38.492,78.882 U10.6@38.492,80.917 38.492,82.177 38.774,82.459 C48.1@38.774,83.312 ; v1(38.603,29.519) 38.613,29.529 39.259,29.529 U1.N1@39.269,29.539 ; v1(38.623,28.801) 38.654,28.77 39.238,28.77 U1.P1@39.269,28.739 ; v1(38.684,26.331) 38.688,26.335 39.265,26.335 U1.U1@39.269,26.339 ; C45.1@38.774,85.294 C48.1@38.774,83.312 ; C45.1@38.774,85.344 v1(39.762,85.344) ; v1(38.87,35.535) 38.873,35.535 U1.F1@39.269,35.139 U1.F1@39.271,35.139 ; U1.A1@39.269,39.139 U1.B2@40.069,38.339 ; U1.A1@39.269,39.143 39.269,40.289 39.886,40.905 v1(40.709,40.905) ; v1(39.669,34.732) 39.673,34.732 40.065,34.339 U1.G2@40.069,34.339 ; v1(39.673,35.547) 39.673,35.541 40.069,35.145 U1.F2@40.069,35.139 ; v1(39.762,83.312) C48.1@38.774,83.312 ; v1(39.963,21.082) C100.1@39.963,21.843 ; v1(40.488,32.359) U1.J3@40.869,32.739 ; U1.R4@41.669,27.939 41.687,27.939 42.072,28.324 v1(42.089,28.324) ; v1(41.726,44.793) 41.76,44.759 41.76,44.563 42.368,43.955 C88.2@42.418,43.955 ; v1(42.444,74.422) R128.2@42.444,75.171 ; v1(42.757,21.082) C103.1@42.757,21.843 ; v1(43.116,44.773) 43.151,44.739 43.151,44.569 43.765,43.955 C87.1@43.815,43.955 ; U1.B6@43.269,38.339 v1(43.669,38.741) ; v1(43.647,31.539) 43.658,31.539 44.058,31.139 U1.L7@44.069,31.139 ; v1(43.647,32.37) 43.647,32.366 44.069,31.943 U1.K7@44.069,31.939 ; v1(43.669,33.139) U1.J7@44.069,32.739 ; v1(43.669,33.939) U1.H7@44.069,33.539 ; v1(43.669,34.739) U1.G7@44.069,34.339 ; v1(44.451,28.323) 44.468,28.323 44.852,27.939 U1.R8@44.869,27.939 ; v1(44.469,30.739) U1.L8@44.869,31.139 ; v1(44.469,31.539) U1.K8@44.869,31.939 ; v1(44.469,33.139) U1.J8@44.869,32.739 ; v1(44.469,33.939) U1.H8@44.869,33.539 ; v1(44.47,34.739) U1.G8@44.869,34.34 ; v1(44.481,44.76) 44.481,44.707 45.212,43.976 R86.2@45.212,43.955 ; v1(44.73,74.422) R125.2@44.73,75.171 ; v1(44.73,82.677) 44.736,82.683 44.736,83.42 C40.1@44.743,83.426 ; v1(45.264,34.739) 45.266,34.739 45.667,34.339 U1.G9@45.669,34.339 ; v1(45.269,30.739) U1.L9@45.669,31.139 ; v1(45.269,31.539) U1.K9@45.669,31.939 ; v1(45.269,33.139) U1.J9@45.669,32.739 ; v1(45.269,33.939) U1.H9@45.669,33.539 ; v1(45.551,21.07) C21.1@45.551,21.831 ; v1(46.082,32.302) 46.082,32.327 46.469,32.714 U1.J10@46.469,32.739 ; v1(46.082,33.139) 46.082,33.145 46.469,33.532 U1.H10@46.469,33.539 U1.H10@46.466,33.536 ; v1(46.082,34) 46.106,34 46.445,34.339 U1.G10@46.469,34.339 ; v1(46.105,37.151) 46.105,37.163 46.469,37.527 U1.C10@46.469,37.539 ; v1@46.133,30.776 46.133,30.789 46.469,31.125 U1.L10@46.469,31.139 ; v1@46.133,31.538 46.168,31.573 46.168,31.638 U1.K10@46.469,31.939 ; v1(46.837,33.881) 46.837,33.894 47.269,34.326 U1.G11@47.269,34.339 ; v1(46.869,33.169) 46.884,33.169 47.254,33.539 U1.H11@47.269,33.539 ; v1(46.895,30.776) 46.901,30.776 47.264,31.139 U1.L11@47.269,31.139 ; v1(46.895,31.518) 46.895,31.541 47.269,31.915 U1.K11@47.269,31.939 ; v1(46.895,32.36) 46.895,32.363 47.269,32.737 U1.J11@47.269,32.739 ; v1(47.665,26.732) v1(47.665,26.732) 48.069,27.138 U1.T12@48.069,27.139 ; v1(48.343,21.082) C46.1@48.343,21.843 ; U1.C13@48.869,37.539 48.873,37.539 49.275,37.941 v1(49.278,37.941) ; C42.1@49.05,84.971 C42.1@49.054,84.976 49.054,85.716 v1(49.059,85.72) ; v1(49.74,21.082) C89.2@49.74,21.843 ; U2.P3@50.357,58.401 52.227,58.401 52.424,58.205 v1(52.487,58.205) ; U1.M15@50.469,30.339 50.49,30.339 50.866,30.716 v1(50.887,30.716) ; U1.L15@50.469,31.139 50.477,31.139 50.879,31.541 v1(50.887,31.541) ; U1.K15@50.469,31.939 v1@50.887,32.357 ; R126.2@51.198,84.976 51.202,84.981 51.202,85.72 v1(51.207,85.725) ; U1.N16@51.269,29.539 51.664,29.934 v1(51.664,30.714) ; U1.J16@51.269,32.739 51.269,32.754 51.669,33.154 v1(51.669,33.169) ; U1.G16@51.269,34.339 51.282,34.339 51.656,34.713 v1(51.669,34.713) ; U1.C16@51.269,37.539 51.269,37.544 51.669,37.944 v1(51.669,37.949) ; v1(51.709,40.985) 51.725,40.985 52.484,40.225 52.484,39.554 U1.A17@52.069,39.139 ; U1.U17@52.069,26.339 U1.U17@52.069,26.339 52.609,26.341 53.013,26.745 v1(53.013,26.75) ; U1.J17@52.069,32.739 52.069,32.754 52.469,33.154 v1(52.469,33.169) ; C43.1@53.361,84.971 C43.1@53.366,84.976 53.366,85.716 v1(53.371,85.72) ; C41.1@53.366,76.721 v1(53.366,77.47) ; v1(55.633,74.362) 55.643,74.371 55.643,75.162 R91.1@55.652,75.171 ; U15.2@56.549,18.604 56.607,18.546 56.607,17.654 v1(57.092,17.169) ; C80.1@57.163,28.702 v1@60.198,28.702 ; C91.1@57.163,33.274 57.258,33.179 v1(59.334,33.179) ; C90.1@57.163,34.671 57.347,34.487 58.983,34.487 v1(58.986,34.484) ; C86.1@57.163,36.703 58.284,36.703 58.401,36.82 58.401,36.848 58.599,37.046 v1(58.599,37.109) ; C47.2@57.163,38.1 57.249,38.014 v1(61.614,38.014) ; C59.1@57.311,14.539 57.334,14.516 v1(57.334,13.606) ; Q1.2@57.618,79.391 57.62,79.389 57.62,78.104 v1(57.622,78.102) ; R162.1@58.835,14.539 58.874,14.539 59.574,13.84 v1(59.574,13.829) ; R161.1@58.835,24.852 58.887,24.852 59.562,25.527 v1(59.563,25.527) ; v1(69.773,59.722) 69.773,59.731 70.215,60.172 U3.H2@70.215,60.181 U3.H2@70.215,60.198 ; v1(69.773,60.722) 69.773,60.739 U3.G2@70.215,61.181 U3.G2@70.215,61.198 ; U3.P2@70.215,54.181 70.222,54.174 70.222,53.538 v1(70.229,53.531) ; v1(70.773,60.722) 70.773,60.739 U3.G3@71.215,61.181 U3.G3@71.215,61.198 ; U3.L3@71.215,57.181 71.222,57.181 71.698,57.657 v1(71.704,57.657) ; v1(71.773,60.722) 71.773,60.739 U3.G4@72.215,61.181 U3.G4@72.215,61.198 ; v1(71.786,55.722) 71.786,55.737 72.215,56.166 U3.M4@72.215,56.181 ; v1(72.773,58.722) 72.773,58.731 73.215,59.172 U3.J5@73.215,59.181 U3.J5@73.215,59.198 ; v1(72.773,60.722) 72.773,60.739 U3.G5@73.215,61.181 U3.G5@73.215,61.198 ; v1(73,81.098) J3.5@73,81.958 ; U3.G6@74.215,61.19 U3.G6@74.215,61.181 74.215,61.172 74.657,60.731 v1(74.657,60.714) ; U3.M7@75.215,56.181 75.23,56.181 v1(75.689,55.722) ; U3.G7@75.215,61.19 U3.G7@75.215,61.181 75.215,61.172 75.657,60.731 v1(75.657,60.714) ; v1@75.704,57.692 U3.L8@76.215,57.181 ; U3.G8@76.215,61.19 76.215,61.172 76.657,60.731 v1(76.657,60.714) ; U3.P9@77.215,54.181 77.222,54.174 77.222,53.549 v1(77.228,53.542) ; U3.H9@77.215,60.19 U3.H9@77.215,60.181 77.215,60.172 77.657,59.731 v1(77.657,59.714) ; U3.G9@77.215,61.19 U3.G9@77.215,61.181 77.215,61.172 77.657,60.731 v1(77.657,60.714) ; v1(83.75,23.241) 83.759,23.25 J4.3@84.958,23.25 ; v1(84.037,43.425) 84.055,43.444 84.902,43.444 J2.2@84.958,43.5
  Top Layer w0.254: TVS2.3@14.228,15.179 14.24,15.19 v1(14.24,15.941) ; v1(17.572,12.893) R116.1@18.292,12.893 ; C35.2@19.855,17.465 v1(20.574,17.465) ; C63.1@34.144,12.198 C63.1@34.15,12.192 34.15,11.383 v1(34.156,11.376) ; v1(39.208,62.238) 39.247,62.238 39.484,62.001 39.624,62.001 ; 43.157,63.5 43.157,64.066 v1(43.164,64.073) ; v1@49.092,56.501 v1(49.128,56.501)
  Top Layer w0.5: C58.1@15.748,58.454 v1(15.748,59.367) ; C32.1@15.86,38.153 15.897,38.19 v1(15.897,38.968) ; U14.4@19.723,48.986 v1(19.723,50.313) ; U4.4@19.877,26.666 19.928,26.615 v1(19.928,24.932) 19.928,24.052 C31.1@20.051,23.929 ; v1(20.981,75.692) C49.1@20.981,76.568 ; v1(20.981,79.375) C50.1@20.981,80.251
  Bottom Layer w0.165: v1(35.123,60.579) C8.1@36.055,60.579 ; v1(35.22,61.914) 35.993,61.914 C12.1@36.055,61.976 ; C19.1@39.243,53.835 39.247,53.835 39.86,53.222 39.86,53.175 v1(39.878,53.157) ; C7.1@41.402,66.688 v1(41.402,67.437) ; C16.1@42.227,53.835 42.236,53.844 43.204,53.844 v1(43.213,53.853) ; C14.1@42.799,66.688 v1(42.799,67.437) ; C20.1@44.196,66.688 v1(44.196,67.437) ; v1(44.372,53.838) 44.373,53.836 45.211,53.836 C15.1@45.212,53.835 ; v1(48.62,67.626) 48.631,67.615 48.631,66.698 C18.1@48.641,66.688 ; C17.1@50.038,66.688 50.043,66.693 50.043,67.622 v1(50.048,67.627) ; C10.1@53.099,59.182 53.099,59.186 53.712,59.799 ; C11.1@53.099,60.579 53.099,60.529 53.828,59.8 53.837,59.8 53.911,59.726 v1(53.975,59.726) ; C9.1@53.099,61.976 53.117,61.994 v1(53.975,61.994) ; C13.1@53.099,63.373 53.113,63.387 53.113,64.074 v1(53.126,64.088) ; v1(68.453,54.292) C2.1@68.453,55.105 ; C3.1@70.218,51.943 70.224,51.949 70.224,52.784 v1(70.231,52.79) ; C6.1@70.231,65.672 v1(70.231,66.421) ; C5.1@71.628,65.672 v1(71.628,66.421) ; C29.1@73.025,65.672 v1(73.025,66.421) ; C30.1@74.422,65.672 v1(74.422,66.421) ; C28.1@75.819,65.672 v1(75.819,66.421) ; C1.1@77.216,65.672 v1(77.216,66.421) ; v1(77.222,52.832) 77.226,52.829 77.226,51.946 C27.1@77.229,51.943 ; v1(78.867,54.229) C4.1@78.867,55.105 ; U18.3@83.439,37.172 83.439,37.021 U18.3@83.617,36.843
  Bottom Layer w0.254: v1(13.872,43.659) 13.888,43.675 C101.1@13.888,44.691 16.459,44.691 16.637,44.513 U17.3@16.637,44.362 ; U16.3@37.282,73.367 37.282,73.209 37.46,73.031 41.709,73.031 41.757,73.08 v1(41.783,73.08) ; C36.1@65.826,77.879 v1(65.826,78.755) ; C37.1@67.604,77.879 v1(67.604,78.755) ; v1(68.568,77.127) U7.2@69.444,77.127 ; v1(73,81.098) J3B.5@73,82.773 ; C38.1@73.874,77.902 v1(73.874,78.778) ; C39.1@75.652,77.879 v1(75.652,78.755) ; v1(76.696,77.127) U6.2@77.572,77.127 ; U18.3@83.617,36.843 C97.1@86.188,36.843 v1(87.122,36.843) ; J2B.8@85.77,44.25 J2B.8@85.77,44.25 v1(87.032,44.248)
  Bottom Layer w0.5: v1(62.77,6.918) 62.77,6.916 64,5.686 J5.6@64,4.186 ; v1(83.75,23.241) 85.639,23.241 J4B.4@85.773,23.375
  other v1: 47.458,9.323 48.093,9.958 48.728,10.593 49.363,11.228 49.998,11.863 50.633,12.498 39.646,13.008 51.268,13.133 51.903,13.768 52.538,14.403 39.646,14.74 39.646,16.518 45.974,16.523 39.646,18.292 45.974,18.326 51.816,18.326 25.669,20.202 25.527,21.146 28.482,21.177 30.049,23.373 29.718,25.654 30.068,26.924 28.194,28.575 60.205,28.706 29.687,30.063 46.082,30.776 30.607,31.369 46.082,31.538 50.887,32.36 25.982,33.377 24.257,33.782 27.432,34.036 73.825,36.035 74.46,36.67 30.035,36.722 67.95,37.061 75.095,37.305 69.075,37.525 29.637,37.79 75.73,37.94 21.396,38.231 30.035,38.354 76.365,38.575 21.326,38.805 77,39.21 70.215,39.811 77.635,39.845 69.144,39.856 28.067,40.137 78.27,40.48 46.571,40.609 78.905,41.115 59.868,41.351 25.443,41.519 22.884,41.917 21.127,42.316 78.613,44.323 25.489,44.448 23.975,44.704 75.565,45.066 77.279,45.085 68.56,45.179 71.919,45.179 30.112,46.783 66.665,48.355 64.733,48.549 64.733,49.612 23.112,50.55 59.824,51.137 66.294,51.454 45.316,52.249 63.803,53.106 47.229,54.54 63.578,55.002 63.321,56.562 62.822,57.318 75.703,57.692 20.955,58.801 46.757,58.905 48.427,58.937 63.13,59.291 48.141,59.62 62.679,59.872 22.479,59.945 22.479,61.014 62.679,61.849 60.258,61.927 56.892,63.859 55.753,63.919 45.704,64.516 57.772,64.977 47.117,65.06 56.589,65.739 54.265,67.622 55.859,67.631 46.739,69.977 48.133,69.977 26.063,76.356 79.78,80.56 77.879,80.578 69.774,80.89 71.674,80.881 50.572,81.407 49.81,81.915 50.445,81.915 51.08,81.915 50.318,82.423 50.953,82.423 51.588,82.423
JTCK/SWCLK: J5.4 J5BK.4 U1.B14 | length 64.3
  Top Layer w0.165: U1.B14@49.669,38.339 50.067,38.737 50.067,40.021 50.07,40.024 50.07,40.485 v1(50.096,40.51)
  Top Layer w0.254: J5.4@70,4.186 70,7.389 70.587,7.976 J5BK.4@70.587,9.373
  L4_SIG w0.13: v1(50.096,40.51) 52.869,43.284 v1(70.506,43.284)
  Bottom Layer w0.254: v1(70.506,43.284) 71.822,41.968 71.822,10.608 J5BK.4@70.587,9.373
JTDI: J5.2 J5BK.8 U1.A14 | length 63.8
  Top Layer w0.165: U1.A14@49.68,39.15 v1(49.68,40.962)
  Top Layer w0.254: J5BK.8@65.507,9.373 65.507,7.108 65.971,6.644 65.971,4.215 J5.2@66,4.186
  L4_SIG w0.13: v1(49.68,40.962) 49.68,40.993 52.77,44.084 v1(68.594,44.084)
  Bottom Layer w0.254: J5BK.8@65.507,9.373 65.507,9.728 66.757,10.979 66.757,13.234 68.028,14.506 68.028,34.671 69.036,35.679 69.036,36.847 68.594,37.29 v1(68.594,44.084)
JTDO/SWO: J5.5 J5BK.2 U1.C6 | length 75.1
  Top Layer w0.165: U1.C6@43.269,37.539 43.269,37.549 43.67,37.949 v1(43.67,37.959)
  Top Layer w0.254: J5.5@72,4.186 72,6.849 73.127,7.976 J5BK.2@73.127,9.373
  L4_SIG w0.13: v1(44.265,40.187) 44.294,40.158 48.032,40.158 52.527,44.653 v1(71.755,44.653)
  Bottom Layer w0.165: v1(43.67,37.959) 44.265,38.554 v1(44.265,40.187)
  Bottom Layer w0.254: v1(71.755,44.653) 72.909,43.499 72.909,14.904 74.603,13.21 74.603,10.849 J5BK.2@73.127,9.373
JTMS/SWDIO: J5.3 J5BK.6 U1.C15 | length 60.5
  Top Layer w0.165: U1.C15@50.469,37.539 v1@50.869,37.939
  Top Layer w0.254: J5.3@68,4.186 68,9.326 J5BK.6@68.047,9.373
  L4_SIG w0.13: v1(51.742,40.331) 53.341,41.93 59.279,41.93 59.528,42.18 64.35,42.18 64.749,41.782 v1(69.697,41.782)
  Bottom Layer w0.165: v1(50.887,37.939) 51.278,38.33 51.278,39.041 51.742,39.504 v1(51.742,40.331)
  Bottom Layer w0.254: J5BK.6@68.047,9.373 68.047,9.513 69.439,10.906 69.439,34.661 69.703,34.925 69.703,41.776 v1(69.697,41.782)
LED1: LED1.2 U1.U2 | length 28.7
  Top Layer w0.152: LED1.2@27.643,3.67 27.669,3.697 28.591,3.697 v1(28.618,3.723)
  Top Layer w0.165: v1(39.554,25.129) 40.069,25.644 U1.U2@40.069,26.339
  L4_SIG w0.13: 37.948,22.194 39.554,23.801 v1(39.554,25.129)
  L4_SIG w0.152: v1(28.618,3.723) 29.123,3.723 29.639,4.239 29.639,5.382 37.948,13.691 37.948,22.194
LED2: LED2.2 U1.U3 | length 27.2
  Top Layer w0.152: LED2.2@31.241,3.67 31.247,3.677 32.252,3.677 v1(32.258,3.683)
  Top Layer w0.165: v1(40.869,25.232) U1.U3@40.869,26.339
  L4_SIG w0.152: v1(32.258,3.683) 32.924,4.349 32.924,7.005 40.869,14.95 v1(40.869,25.232)
LVDS_RxC_N: J3.9 J3B.1 | length 2.9
  Top Layer w0.165: v1(67,81.098) J3.9@67,81.958
  Bottom Layer w0.254: v1@67.002,81.122 67.727,81.847 67.727,82.5 J3B.1@68,82.773
LVDS_RxC_P: J3.8 J3B.2 | length 2.8
  Top Layer w0.165: v1(68.5,81.098) J3.8@68.5,81.958
  Bottom Layer w0.254: v1(68.5,81.098) 69.143,81.741 69.143,82.666 J3B.2@69.25,82.773
LVDS_RxD_N: J3.4 J3B.6 | length 2.6
  Top Layer w0.165: v1(74.5,81.098) J3.4@74.5,81.958
  Bottom Layer w0.254: J3B.6@74.25,82.773 74.25,81.374 74.5,81.124 v1(74.5,81.098)
LVDS_RxD_P: J3.3 J3B.7 | length 2.7
  Top Layer w0.165: v1(76,81.098) J3.3@76,81.958
  Bottom Layer w0.254: J3B.7@75.5,82.773 75.5,81.598 v1(76,81.098)
LVDS_SPI_MOSI: U1.C11 U6.5 | length 62.3
  Top Layer w0.165: U1.C11@47.269,37.539 47.231,37.577 47.029,37.577 46.668,37.938 46.273,37.938 46.065,38.146 46.065,39.632 46.32,39.888 46.638,39.888 v1@47.446,40.696
  L4_SIG w0.13: v1(47.446,40.706) 47.498,40.758 47.815,40.758 59.072,52.015 59.072,68.628
  L4_SIG w0.169: 59.072,68.628 63.977,73.533 78.281,73.533 v1(80.097,75.349)
  Bottom Layer w0.169: U6.5@80.082,76.177 80.097,76.162 v1(80.097,75.349)